# Altium PCB DVT-Buffer.PcbDoc
Units mm, origin at the board's own origin, x right, y up, seen from the top; angles counter-clockwise.
Board outline 46 x 50 mm, 2 copper layers (Top Layer, Bottom Layer); 20 components, 13 nets, 46 pads, 2 vias.
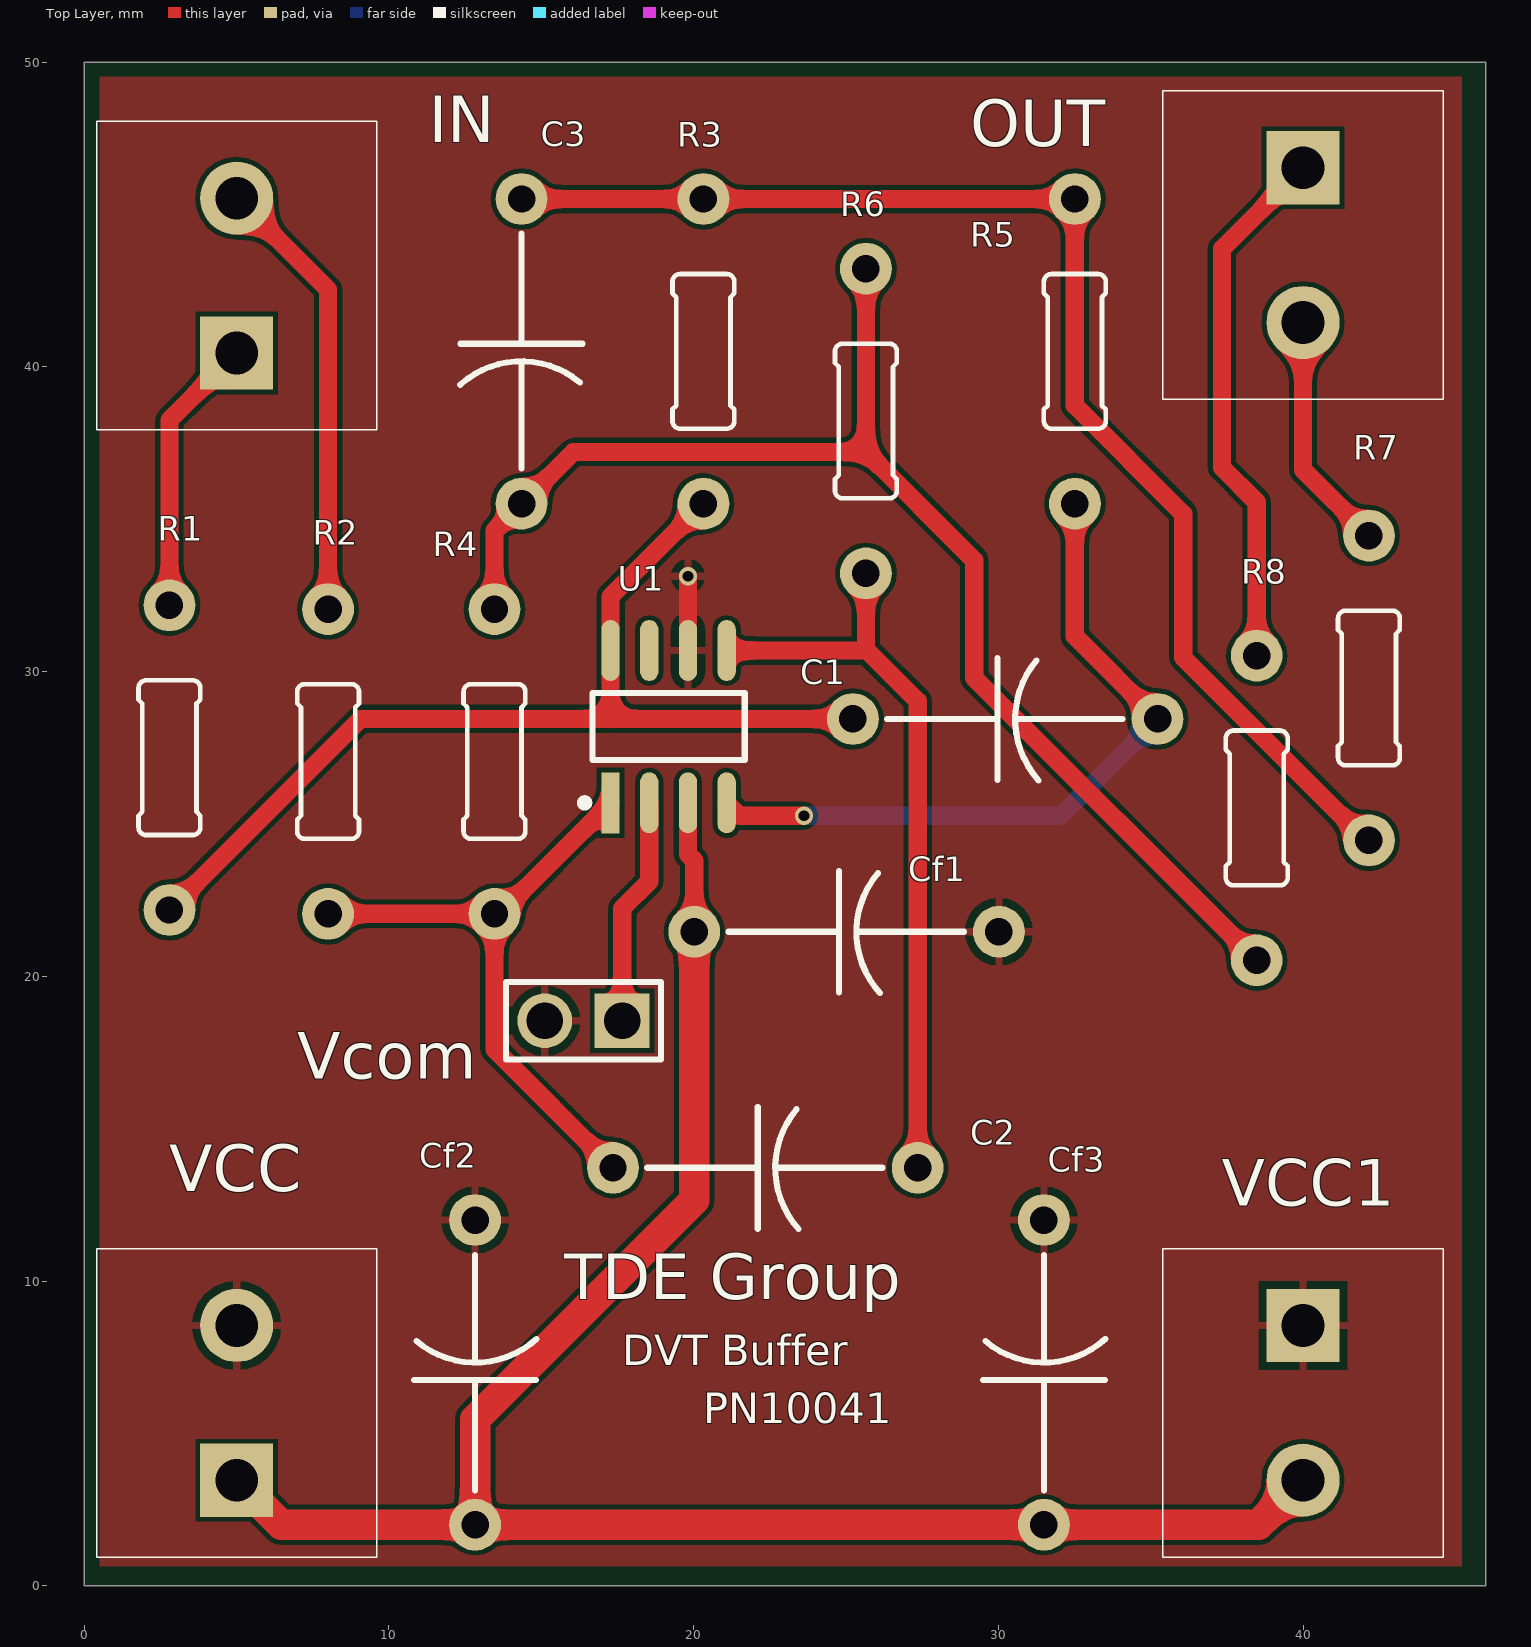
[diagram p0: Top Layer view]
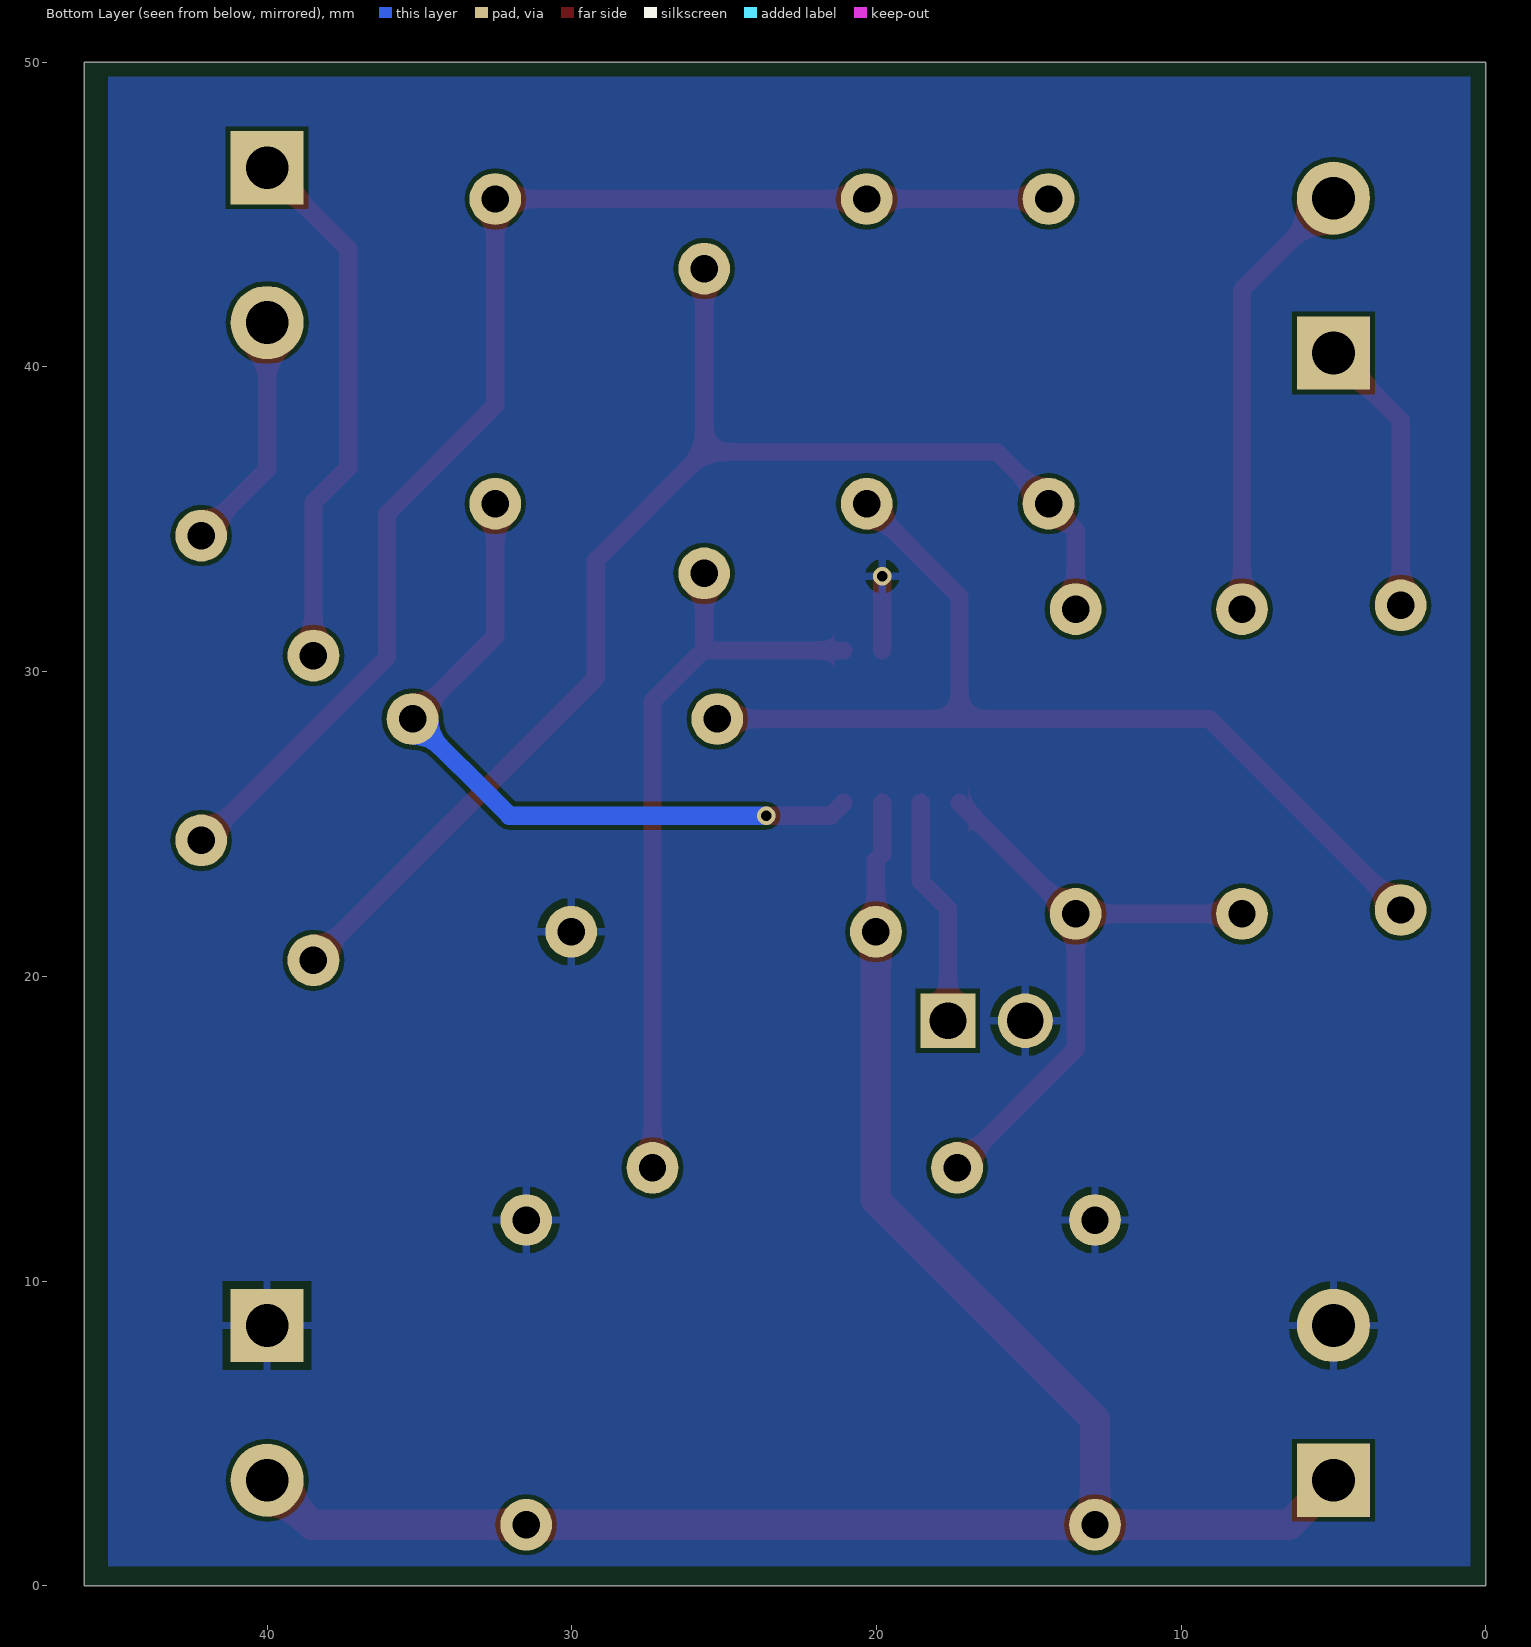
[diagram p1: Bottom Layer view, seen from below]

## Layer stack, top to bottom
Top Solder: solder mask 0.0102, Solder Resist, Dk 3.5
Top Layer: signal copper 0.0356
Dielectric 1: dielectric 0.32, FR-4, Dk 4.8
Bottom Layer: signal copper 0.0356
Bottom Solder: solder mask 0.0102, Solder Resist, Dk 3.5

## Board outline
0,0 46,0 46,50 0,50

## Design rules (kind name [scope] priority, off if disabled: settings)
Clearance [All] p1: gap=0.15
MinimumSolderMaskSliver [All] p1: minsoldermaskwidth=0.1
PolygonConnect [All] p1: connectstyle=Relief reliefconductorwidth=0.254 reliefentries=4 polygonreliefangle="90 Angle" airgapwidth=0.254
RoomDefinition DVT-Buffer [InComponentClass('DVT-Buffer')] p1: confinementstyle=ConfineIn formatcopy=TRUE lockcomponents=FALSE outline -3.175,-4.064 48.387,-4.064 48.387,51.181 -3.175,51.181
RoutingVias [All] p1: holewidth=0.35 width=0.6 viastyle="Through Hole" minholewidth=0.3 minwidth=0.5 maxholewidth=0.711 maxwidth=1.27
SilkToSilkClearance [All] p1: silktosilkclearance=0.15
SilkToSolderMaskClearance [IsPad] p1: minsilkscreentomaskgap=0.15 clearancetoexposedcopper=TRUE
SolderMaskExpansion [All] p1: expansion=0.102
Width [All] p1: maxlimit=4 minlimit=0.254 preferedwidth=0.254
27 further rules are at their usual default settings.

## Components (designator, comment, footprint, x,y, rotation, side; value= is the part's Value field where it differs from the comment)
C1 "Capacitor-Dummy-THT" Dummy-10mm 30.226,28.448 r0 top
C2 "Capacitor-Dummy-THT" Dummy-10mm 22.352,13.716 r0 top
C3 "Capacitor-Dummy-THT" Dummy-10mm 14.351,40.513 r270 top
Cf1 "Capacitor-Dummy-THT" Dummy-10mm 25.019,21.463 r0 top
Cf2 "Capacitor-Dummy-THT" Dummy-10mm 12.827,7 r90 top
Cf3 "Capacitor-Dummy-THT" Dummy-10mm 31.496,7 r90 top
IN "PHOENIX_1715721" Phoenix-2-5_08 5,43 r90 top
OUT "PHOENIX_1715721" Phoenix-2-5_08 40,44 r270 top
R1 "Resistor-Dummy-THT" Dummy-10mm 2.794,27.178 r270 top
R2 "Resistor-Dummy-THT" Dummy-10mm 8.001,27.051 r270 top
R3 "Resistor-Dummy-THT" Dummy-10mm 20.32,40.513 r90 top
R4 "Resistor-Dummy-THT" Dummy-10mm 13.462,27.051 r90 top
R5 "Resistor-Dummy-THT" Dummy-10mm 32.512,40.513 r90 top
R6 "Resistor-Dummy-THT" Dummy-10mm 25.654,38.227 r90 top
R7 "Resistor-Dummy-THT" Dummy-10mm 42.164,29.464 r270 top
R8 "Resistor-Dummy-THT" Dummy-10mm 38.481,25.527 r90 top
U1 "THS4521ID" SOIC8_N 19.177,28.194 r0 top
VCC "PHOENIX_1715721" Phoenix-2-5_08 5,6 r90 top
VCC1 "PHOENIX_1715721" Phoenix-2-5_08 40,6 r270 top
Vcom "Plug_2_90_2.54" HDR1X2 16.383,18.542 r180 top

## Footprints (in the part's own frame and the unit in brackets; to place one, negate y for a bottom-side part, rotate by r counter-clockwise, add the part's x,y. Pads: shape width x height; smd on the part's side, far side on the other; paste and mask are expansions set on the pad)
Dummy-10mm [mm] "Dummy-10mm"
  round 1.7 hole 0.9: 1(-5,0) 2(5,0)
  silkscreen extent -3.88,-2.01 3.85,2, body extent -2.39,-0.88 2.41,0.88, height 1.87
HDR1X2 [mm] "Connector; Header; 2 Position"
  rect 1.8x1.8 hole 1.2: 1(-1.27,0)
  round 1.8 hole 1.2: 2(1.27,0)
  silkscreen extent -2.54,-1.27 2.54,1.27, body extent -2.54,-1.27 2.54,1.27, height 8.62
Phoenix-2-5_08 [mm] "Phoenix, 1715721"
  rect 2.4x2.4 hole 1.4: 1(-2.54,0)
  round 2.4 hole 1.4: 2(2.54,0)
  silkscreen extent -5.06,-4.6 5.06,4.6, body extent -5.05,-5.19 5.85,4.61, height 14.2
SOIC8_N [mm] "SOIC, 8-Leads, Body 4.9x3.9mm, Pitch 1.27mm, IPC Medium Density"
  rect 0.6x2 smd: 1(-1.905,-2.5)
  oval 0.6x2 smd: 2(-0.635,-2.5) 3(0.635,-2.5) 4(1.905,-2.5) 5(1.905,2.5) 6(0.635,2.5) 7(-0.635,2.5) 8(-1.905,2.5)
  silkscreen extent -2.88,-2.62 2.5,1.1, body extent -2.54,-2.95 2.54,3.05, height 1.7

## Part data
IN OUT VCC VCC1: library part 2Pol_1715721, "Phoenix, 2 pol, 5.08mm, 22A, 715721"
U1: "Fully differential OP, 50MHz"
Vcom: "Plug, 2-Pin"

## Via types
v1: diameter 0.6, hole 0.35, Top Layer to Bottom Layer, 2 vias

## Nets (pads, with @x,y where several pads share a name; then routed paths per layer and width w, separated by ;. In a path a pad name is that pad's centre, name@x,y a point inside that pad or via, vN(x,y) a via of type N, cw(c..) or ccw(c..) an arc to the next point about the centre after c; other vN are vias at no path point)
GND: Cf1.2 Cf2.2 Cf3.2 U1.6 VCC1.1 VCC.2 Vcom.2 | length 2.4
  Top Layer w0.6: U1.6 v1(19.812,33.132)
NetC1_1: C1.1 R1.2 R3.1 U1.8 | length 33.4
  Top Layer w0.6: R1.2 9.064,28.448 17.272,28.448 ; R3.1 17.272,32.465 U1.8 17.272,28.448 ; C1.1 17.272,28.448
NetC1_2: C1.2 R5.1 U1.4 | length 23.8
  Top Layer w0.6: U1.4 21.503,25.273 v1(23.622,25.273) ; R5.1 32.512,31.162 C1.2
  Bottom Layer w0.6: v1(23.622,25.273) 32.051,25.273 C1.2
NetC2_1: C2.1 R2.2 R4.1 U1.1 | length 20.7
  Top Layer w0.6: R2.2 R4.1 ; U1.1 13.629,22.051 R4.1 ; C2.1 13.462,17.606 R4.1
NetC2_2: C2.2 R6.1 U1.5 | length 24.8
  Top Layer w0.6: U1.5 25.654,30.694 R6.1 ; 25.674,30.714 27.352,29.036 C2.2
NetC3_1: C3.1 R3.2 R5.2 R7.2 | length 43.3
  Top Layer w0.6: C3.1 R3.2 R5.2 32.512,38.735 36.068,35.179 36.068,30.467 42.071,24.464 R7.2
NetC3_2: C3.2 R4.2 R6.2 R8.1 | length 43.8
  Top Layer w0.6: R4.2 13.462,34.624 C3.2 16.049,37.211 25.654,37.211 ; R6.2 25.654,37.211 ; R8.1 29.21,29.798 29.21,33.655 25.654,37.211
NetIN_1: IN.1 R1.1 | length 9.2
  Top Layer w0.6: R1.1 2.794,38.254 IN.1
NetIN_2: IN.2 R2.1 | length 14.7
  Top Layer w0.6: IN.2 8.001,42.539 R2.1
NetOUT_1: OUT.1 R8.2 | length 17.6
  Top Layer w0.6: R8.2 38.481,35.56 37.338,36.703 37.338,43.878 OUT.1
NetOUT_2: OUT.2 R7.1 | length 7.9
  Top Layer w0.6: OUT.2 40,36.628 R7.1
NetU1_2: U1.2 Vcom.1 | length 7.5
  Top Layer w0.6: Vcom.1 17.653,22.225 18.542,23.114 U1.2
VCC: Cf1.1 Cf2.1 Cf3.1 U1.3 VCC1.2 VCC.1 | length 63
  Top Layer w0.6: U1.3 19.812,24.003 20.019,23.796 Cf1.1
  Top Layer w1: VCC.1 6.46,2 Cf2.1 ; Cf1.1 20.019,12.653 12.827,5.461 Cf2.1 ; VCC1.2 38.54,2 Cf3.1 Cf2.1
pads on no net: U1.7

## Polygon pours and split planes (outlines as drawn)
GND on Bottom Layer "GND" (solid, pour order 0): 0.508,0.635 0.508,49.53 45.212,49.53 45.212,0.635
GND on Top Layer "GND" (solid, pour order 2): 0.508,0.635 0.508,49.53 45.212,49.53 45.212,0.635

## Silkscreen, mask and mechanical layers (free items; w line width, h text height)
Top Overlay:
  text "TDE Group" at 15.748,9.398 h1.5
  text "DVT Buffer" at 17.653,7.239 h1
  text "PN10041" at 20.32,5.334 h1
Outline:
  the board outline again, w0.3

## Dimensions
46,50 to 46,0 on Mechanical 16
46,0 to 0,0 on Mechanical 16